# Altium PCB PCB1.PcbDoc
Units mil, origin at the board's own origin, x right, y up, seen from the top; angles counter-clockwise.
Board outline 2955 x 1380 mil, 2 copper layers (Top Layer, Bottom Layer); 26 components, 24 nets, 71 pads, 4 vias.
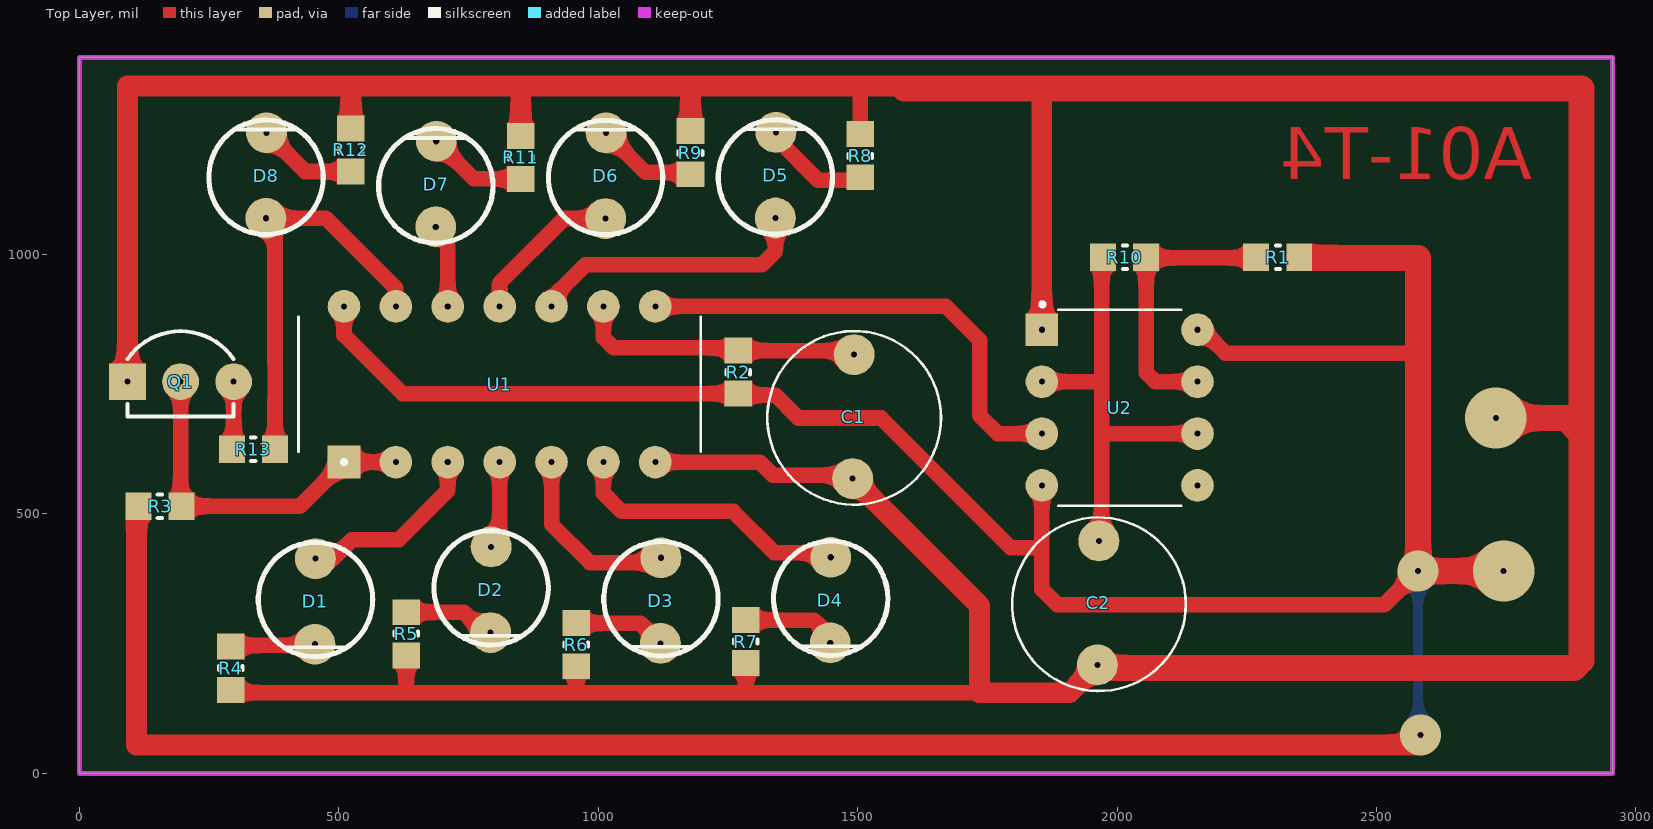
[diagram p0: Top Layer view]
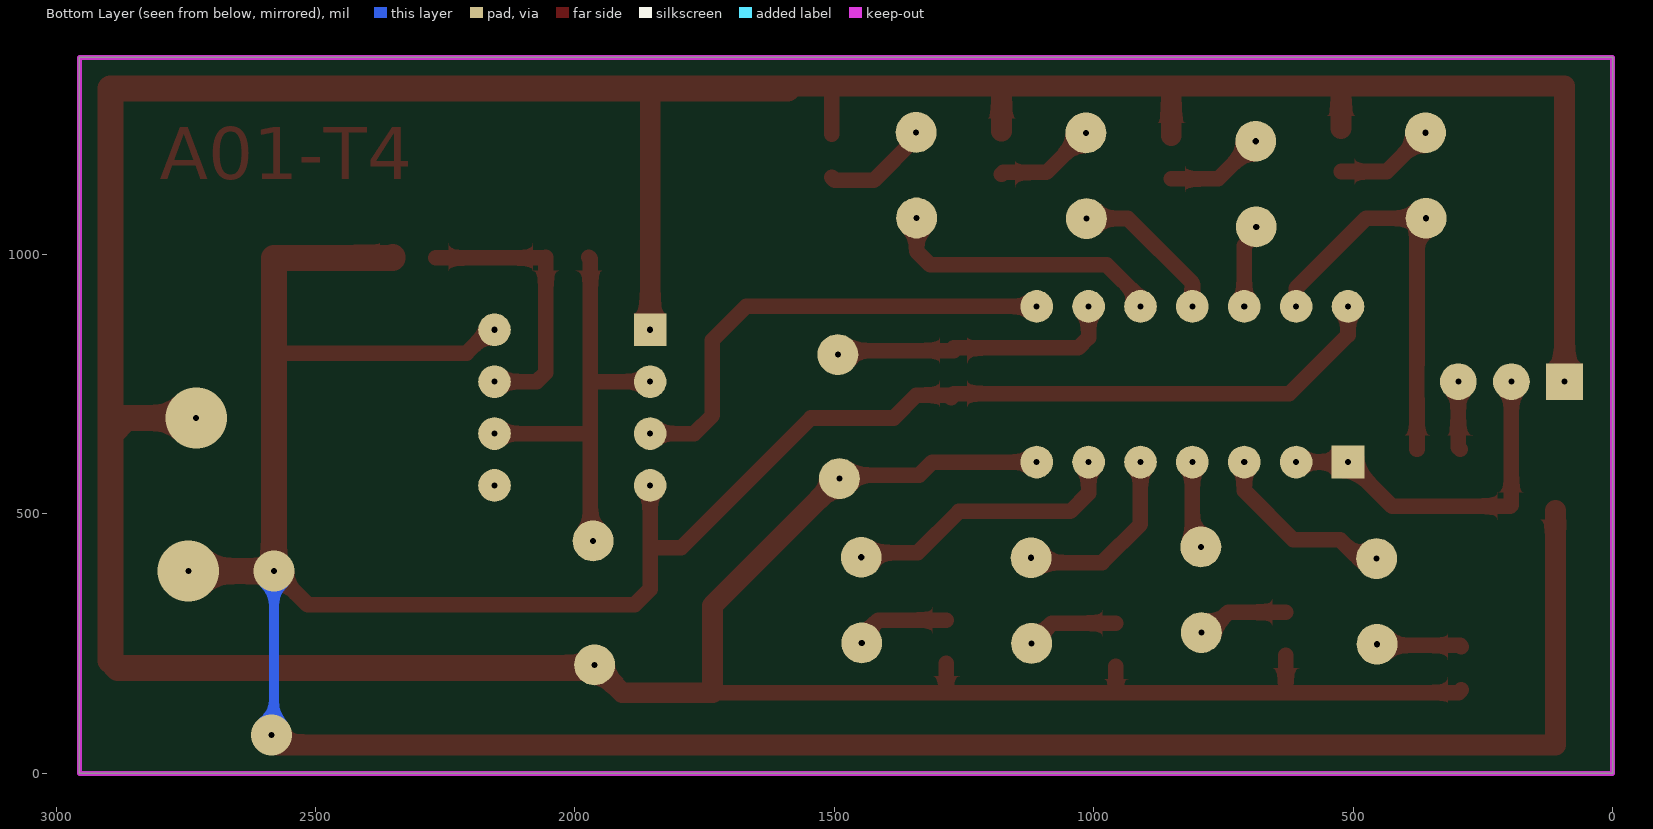
[diagram p1: Bottom Layer view, seen from below]
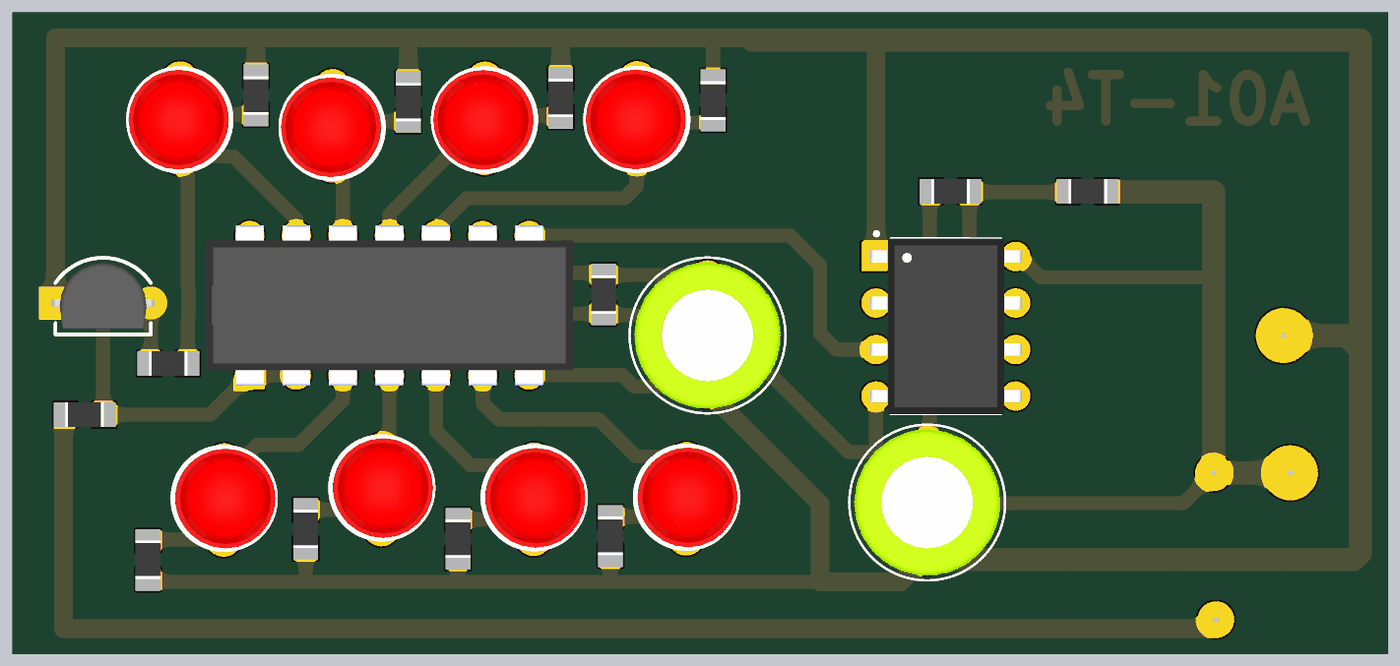
[diagram p2: 3D render of the assembled board from above, using the file's embedded part models]

## Layer stack, top to bottom
Top Solder: solder mask 0.4, Solder Resist, Dk 3.5
Top Layer: signal copper 1.4
Dielectric 1: dielectric 12.6, FR-4, Dk 4.8
Bottom Layer: signal copper 1.4
Bottom Solder: solder mask 0.4, Solder Resist, Dk 3.5

## Board outline
0,0 0,1380 2955,1380 2955,0

## Design rules (kind name [scope] priority, off if disabled: settings)
Clearance [All] p1: gap=30 ignorepadtopadclearanceinfootprint=FALSE
PolygonConnect [All] p1: connectstyle=Relief reliefconductorwidth=10 reliefentries=4 polygonreliefangle="90 Angle" airgapwidth=10
RoutingVias [All] p1: holewidth=11.81 width=78.74 viastyle="Through Hole" minholewidth=11.81 minwidth=78.74 maxholewidth=11.81 maxwidth=500
SolderMaskExpansion [All] p1: expansion=4 istentingtop=FALSE
SupplyNets "Schematic Supply Nets_1" [InNet('VCC')] p1: voltage=0.000
SupplyNets "Schematic Supply Nets" [InNet('GND')] p2: voltage=0.000
Width [All] p1: maxlimit=100 minlimit=20 preferedwidth=30
30 further rules are at their usual default settings.

## Components (designator, comment, footprint, x,y, rotation, side; value= is the part's Value field where it differs from the comment)
C1 "0.1u" CAP_8x11mm 1493.21,754.15 r270 top
C2 "4.7u" CAP_8x11mm 1965,395 r270 top
D1 "LED" LED-TH-2.54mm-RED 455,335 r270 top
D2 "LED" LED-TH-2.54mm-RED 793.62,357.55 r270 top
D3 "LED" LED-TH-2.54mm-RED 1120.87,336.52 r270 top
D4 "LED" LED-TH-2.54mm-RED 1448.11,337.49 r270 top
D5 "LED" LED-TH-2.54mm-RED 1341.38,1149.42 r90 top
D6 "LED" LED-TH-2.54mm-RED 1014.13,1148.44 r90 top
D7 "LED" LED-TH-2.54mm-RED 686.89,1132.43 r90 top
D8 "LED" LED-TH-2.54mm-RED 359.65,1148.84 r90 top
Q1 "SS8050-G" TO-92 195,769.96 r90 top
R1 "1K5" RES0805_SMD 2310,995 r0 top
R2 "1K" RES0805_SMD 1270,773 r270 top
R3 "1K" RES0805_SMD 155,515 r180 top
R4 "470" RES0805_SMD 291.38,203.18 r90 top
R5 "470" RES0805_SMD 630,269.64 r90 top
R6 "470" RES0805_SMD 957.24,248.52 r90 top
R7 "470" RES0805_SMD 1284.49,254.38 r90 top
R8 "470" RES0805_SMD 1505,1190 r270 top
R9 "470" RES0805_SMD 1177.76,1195.8 r270 top
R10 "68K" RES0805_SMD 2015,995 r0 top
R11 "470" RES0805_SMD 850.51,1186.74 r270 top
R12 "470" RES0805_SMD 523.27,1201.02 r270 top
R13 "6K8" RES0805_SMD 335,625 r180 top
U1 "IC4518" DIP794W45P254L1969H508Q14 810,750 r90 top
U2 "LM555" LM555 2005,705 r0 top

## Footprints (in the part's own frame and the unit in brackets; to place one, negate y for a bottom-side part, rotate by r counter-clockwise, add the part's x,y. Pads: shape width x height; smd on the part's side, far side on the other; paste and mask are expansions set on the pad)
CAP_8x11mm [mm]
  round 2 hole 0.3: 1(-1.346,0) 2(4.724,-0.076)
  silkscreen extent -2.5,-4.25 6,4.25, body extent -2.25,-4 5.75,4, height 12.52
DIP794W45P254L1969H508Q14 [mm]
  rect 1.6x1.6 hole 0.3: 1(-3.81,7.62)
  round 1.6 hole 0.3: 2(-3.81,5.08) 3(-3.81,2.54) 4(-3.81,0) 5(-3.81,-2.54) 6(-3.81,-5.08) 7(-3.81,-7.62) 8(3.81,-7.62) 9(3.81,-5.08) 10(3.81,-2.54) 11(3.81,0) 12(3.81,2.54) 13(3.81,5.08) 14(3.81,7.62)
  silkscreen extent -3.91,-9.84 3.3,9.84, body extent -4.38,-10 4.38,10, height 5.1
LED-TH-2.54mm-RED [mm]
  round 2 hole 0.3: 1(-2.007,0) 2(2.184,-0.025)
  silkscreen extent -2.8,-2.8 2.8,2.8, body extent -2.72,-2.65 2.72,2.8, height 12.31
LM555 [mm]
  rect 1.6x1.6 hole 0.3: 1(-3.81,3.81)
  round 1.6 hole 0.3: 2(-3.81,1.27) 3(-3.81,-1.27) 4(-3.81,-3.81) 5(3.81,-3.81) 6(3.81,-1.27) 7(3.81,1.27) 8(3.81,3.81)
  silkscreen extent -3.88,-4.79 3,5.15, body extent -4.15,-4.79 4.15,4.79, height 5.08
RES0805_SMD [mil]
  rect 50x53.15 smd: 1(-42,0) 2(41,0)
  silkscreen extent -4,-23 4,23, body extent -41,-27 41,27, height 24
TO-92 [mm]
  rect 1.8x1.8 hole 0.3 paste-2539.97 mask+0: 1(-0.38,2.6)
  round 1.8 hole 0.3 paste-2539.97 mask+0: 2(-0.38,0) 3(-0.38,-2.6)
  silkscreen extent -2.09,-2.6 2.09,2.6, body extent -2.19,-3.42 2.19,3.42, height 0.25

## Part data
C1: library part CAPACITOR
C2: library part CAPACITOR_1
Q1: "Bipolar (BJT) Transistor NPN 25 V 1.5 A 100MHz 300 mW Surface Mount SOT-23-3", Package=None, Check_prices=https://www.snapeda.com/parts/SS8050G/Comchip/view-part/?ref=eda, Digi-Key_Part_Number=641-1790-2-ND, MF=Comchip, MP=SS8050G, SnapEDA_Link=https://www.snapeda.com/parts/SS8050G/Comchip/view-part/?ref=snap
R1 R2 R3 R4 R5 R6 R7 R8 R9 R10 R11 R12 R13: library part RESISTOR
U1: "CMOS Dual BCD Up-Counter", Package="PDIP-16 Texas Instruments", Check_prices=https://www.snapeda.com/parts/CD4518BE/Texas+Instruments/view-part/?ref=eda, MF="Texas Instruments", MP=CD4518BE, SnapEDA_Link=https://www.snapeda.com/parts/CD4518BE/Texas+Instruments/view-part/?ref=snap
U2: library part LM555CN/NOPB, "Highly Stable 555 Timer", Package="PDIP-8 Texas", Check_prices=https://www.snapeda.com/parts/LM555CN/NOPB/Texas+Instruments/view-part/?ref=eda, MF="Texas Instruments", MP=LM555CN/NOPB, SnapEDA_Link=https://www.snapeda.com/parts/LM555CN/NOPB/Texas+Instruments/view-part/?ref=snap

## Via types
v1: diameter 118.11, hole 11.81, Top Layer to Bottom Layer, 2 vias
v2: diameter 78.74, hole 11.81, Top Layer to Bottom Layer, 2 vias

## Nets (pads, with @x,y where several pads share a name; then routed paths per layer and width w, separated by ;. In a path a pad name is that pad's centre, name@x,y a point inside that pad or via, vN(x,y) a via of type N, cw(c..) or ccw(c..) an arc to the next point about the centre after c; other vN are vias at no path point)
D1: D1.1 U1.3 | length 364.3
  Top Layer w30: D1.1 489,414 525,450 615,450 710,545 U1.3
D2: D2.1 U1.4 | length 170.2
  Top Layer w30: D2.1 810,452.93 U1.4
D3: D3.1 U1.5 | length 365.3
  Top Layer w30: U1.5 910,480 983.81,406.19 1111.54,406.19 D3.1
D4: D4.1 U1.6 | length 549.3
  Top Layer w30: U1.6 1010,540 1045,505 1260,505 1339.63,425.37 1439.23,425.37 D4.1
D5: D5.1 U1.10 | length 548.3
  Top Layer w30: U1.10 910,915 975,980 1155,980 1315,980 1341.38,1006.38 D5.1
D6: D6.1 U1.11 | length 300.7
  Top Layer w30: U1.11 810,945 934.44,1069.44 D6.1
D7: D7.1 U1.12 | length 163
  Top Layer w30: D7.1 686.89,1040.24 710,1017.13 U1.12
D8: D8.1 R13.1 U1.13 | length 793.9
  Top Layer w30: R13.1 377,720.89 377.8,721.68 377.8,788.32 377,789.11 377,1052.48 D8.1 475.16,1069.84 610,935 U1.13
GND: C1.2 C2.2 Q1.1 R4.1 R5.1 R6.1 R7.1 R8.1 R9.1 R11.1 R12.1 U1.7 U2.1 | length 9215.3
  Top Layer w30: R4.1 296.98,155.58 628.49,155.58 ; R5.1 630,157.09 628.49,155.58 ; R6.1 957.24,158.34 960,155.58 ; U1.7 1311.22,600 1336.22,575 1462.59,575 1472.98,585.38 C1.2@1490.21,568.15 ; R7.1 1284.49,160.07 1280,155.58 ; R8.1 1505,1325 ; 1735,155.58 1280,155.58 ; 628.49,155.58 960,155.58 ; 960,155.58 1280,155.58
  Top Layer w40: Q1.1 92.64,1325 392.87,1325 ; 396.87,1325 530,1325 ; R12.1 523.27,1318.27 530,1325 ; R11.1 850.51,1313.74 845,1319.25 845,1325 ; R9.1 1177.76,1322.24 1175,1325 ; C1.2 1735,323.36 1735,155.58 1908.58,155.58 C2.2 ; 1590,1320 1585,1325 1505,1325 1175,1325 ; U2.1 1855,1320 ; 530,1325 845,1325 ; 845,1325 1175,1325
  Top Layer w50: 1590,1320 1855,1320 2895,1320 2895,655 ; C2.2 1967.5,203.5 2880.63,203.5 2895,217.87 2895,655 ; v1(2730,685) 2865,685 2895,655
NetC1_1: C1.1 R2.1 U1.9 | length 554.7
  Top Layer w30: U1.9 1010,840 1030,820 R2.1@1270,820 ; R2.1 1485.36,815 C1.1
NetC2_1: C2.1 R10.1 U2.2 U2.6 | length 852.4
  Top Layer w30: U2.2 1863.93,755 1970,755 ; C2.1 1970,453 1970,650 ; R10.1 1970,992 1970,755 ; U2.6 1975,655 1970,650 ; 1970,650 1970,755
NetD1_2: D1.2 R4.2 | length 164.6
  Top Layer w30: R4.2 293.79,246.59 451.59,246.59 D1.2
NetD2_2: D2.2 R5.2 | length 178.8
  Top Layer w30: R5.2 740.35,310.64 779.43,271.55 D2.2
NetD3_2: D3.2 R6.2 | length 178.8
  Top Layer w30: R6.2 1023.82,289.52 1080.77,289.52 1110.44,259.84 1110.54,259.84 D3.2
NetD4_2: D4.2 R7.2 | length 187.9
  Top Layer w30: R7.2 1346.06,295.38 1415.36,295.38 1447.11,263.63 D4.2
NetD5_2: D5.2 R8.2 | length 209.6
  Top Layer w30: D5.2 1342.38,1224.53 1423.66,1143.25 1499.25,1143.25 R8.2
NetD6_2: D6.2 R9.2 | length 195.6
  Top Layer w30: D6.2 1091.18,1158.39 1174.16,1158.39 R9.2
NetD7_2: D7.2 R11.2 | length 192.7
  Top Layer w30: D7.2 760.58,1145.74 R11.2
NetD8_2: D8.2 R12.2 | length 193.6
  Top Layer w30: D8.2 435.46,1160.02 R12.2
NetQ1_2: Q1.2 R3.1 U1.1 U1.2 | length 686.2
  Top Layer w30: R3.1@195,517 Q1.2 ; R3.1 425,515 U1.1 U1.2
NetQ1_3: Q1.3 R13.2 | length 131.5
  Top Layer w30: R13.2 297.54,628.54 297.54,754.82 Q1.3
NetR1_1: R1.1 R10.2 U2.7 | length 540.7
  Top Layer w30: R10.2@2056,993.43 R1.1@2268,993.43 ; R10.2 2056,772.57 2073.57,755 U2.7
NetU1_8: U1.8 U2.3 | length 931.4
  Top Layer w30: U1.8 1670,900 1735,835 1735,690 1770,655 U2.3
VCC: R1.2 R2.2 R3.2 U1.14 U2.4 U2.8 | length 7228.2
  Top Layer w30: U1.14 510,845 623,732 R2.2 ; R2.2@1275,724 1280,729 1341.57,729 1385.58,685 1545,685 1791.94,438.06 ; 1795,435 1855,435 ; 1855,355 1885,325 2515,325 v2(2580,390) ; 1855,360 1855,435 ; U2.4 1855,435 ; U2.8 2163.93,855 2208.93,810 2580,810
  Top Layer w40: R3.2@110,506.6 110,55 2575,55 2585,65 v2(2585,74.37)
  Top Layer w50: R1.2 2351,993.43 2580,993.43 2580,810 v2(2580,390) 2585,395 2590,390 v1(2745,390)
  Bottom Layer w20: v2(2580,390) 2580,74.37 v2(2585,74.37)
pads on no net: U2.5

## Keep-outs
Keep-Out Layer:
  the board outline again, w10

## Other copper
Top Layer:
  text "A01-T4" at 2800,1145 h100